# Altium PCB Tassel43_Without_RGB_Mid.pcbdoc
Units mil, origin at the board's own origin, x right, y up, seen from the top; angles counter-clockwise.
Board outline 4120 x 3600 mil, 2 copper layers (Top Layer, Bottom Layer); 26 components, 35 nets, 97 pads, 53 vias.
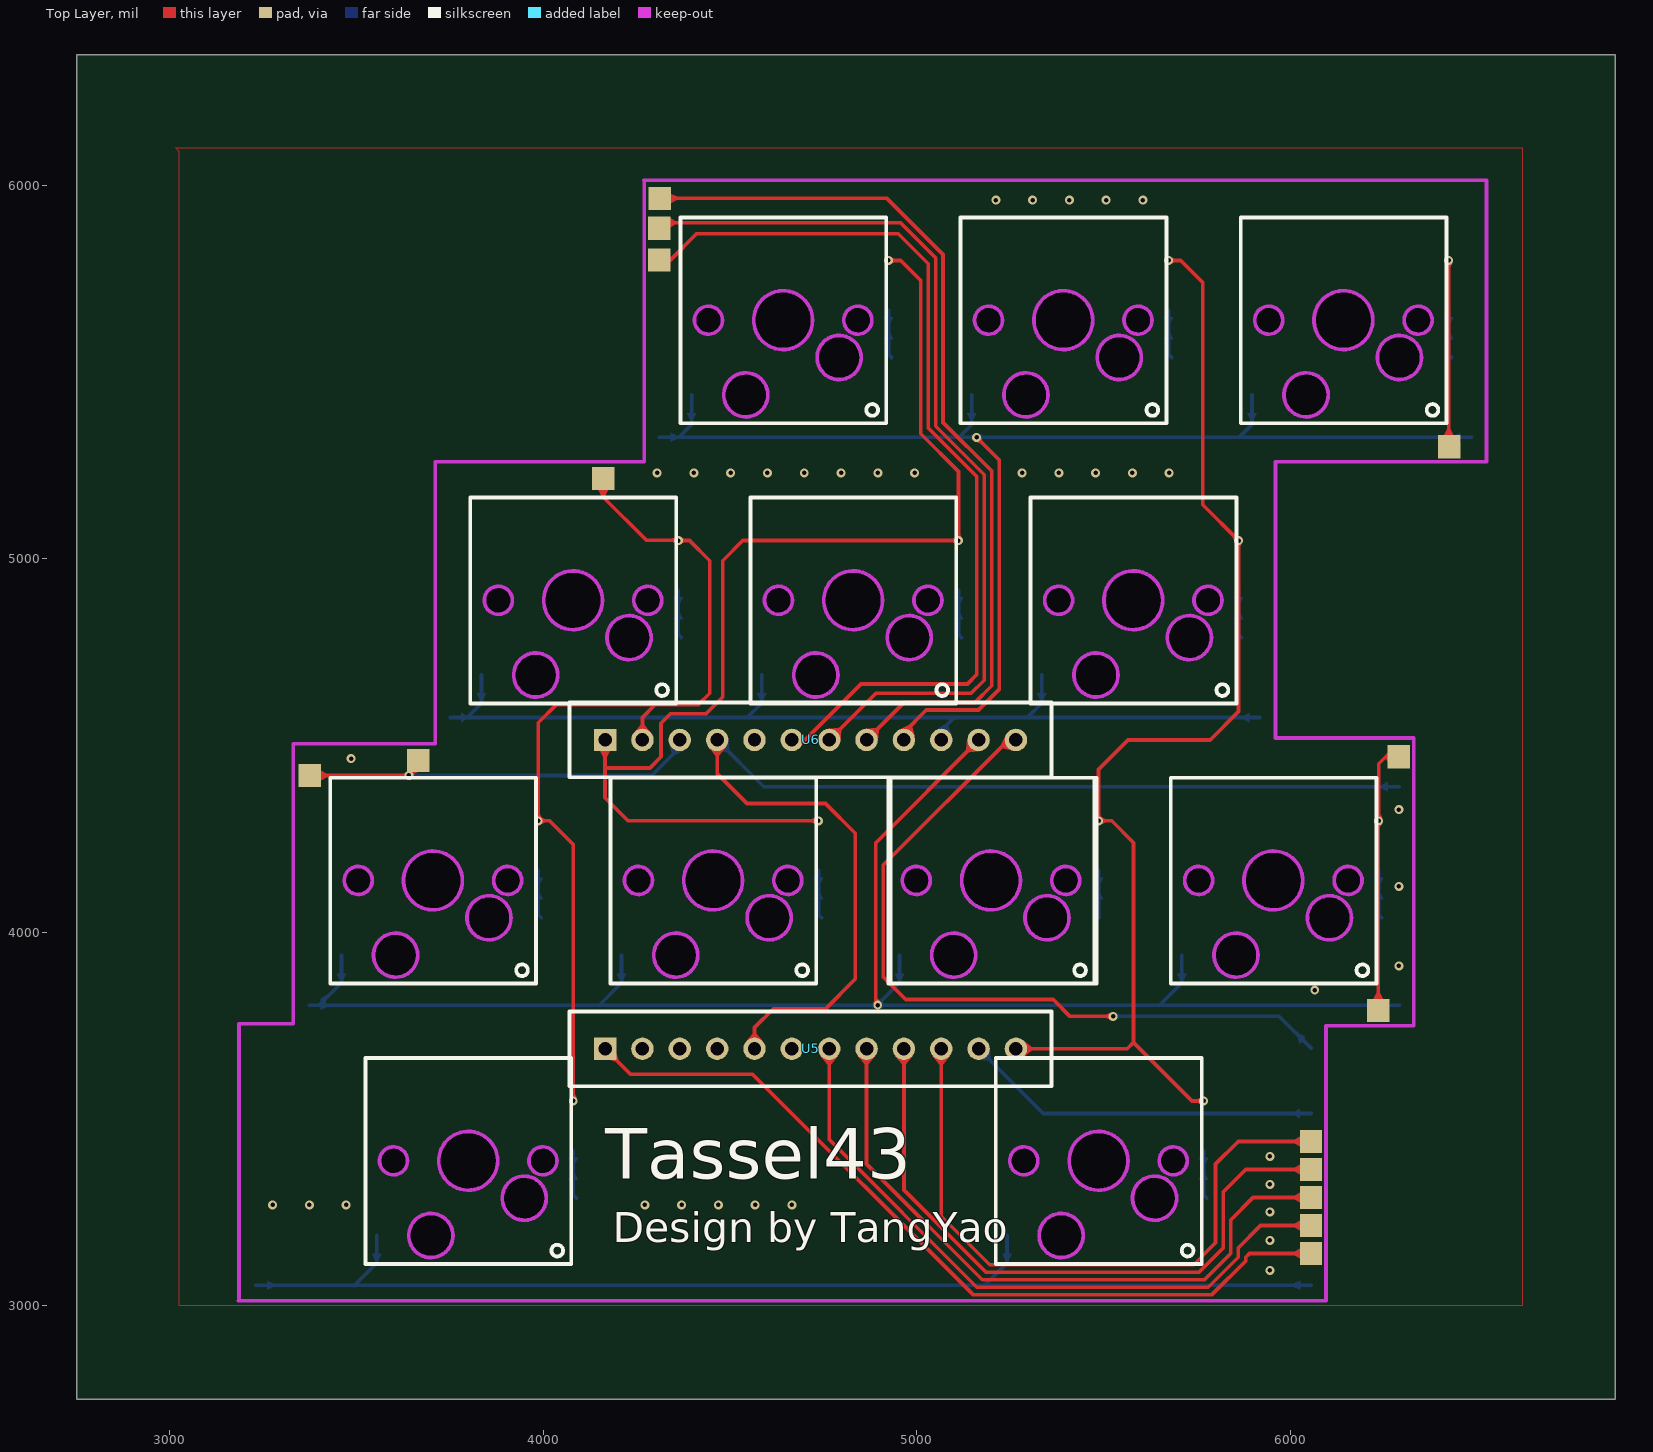
[diagram p0: Top Layer view]
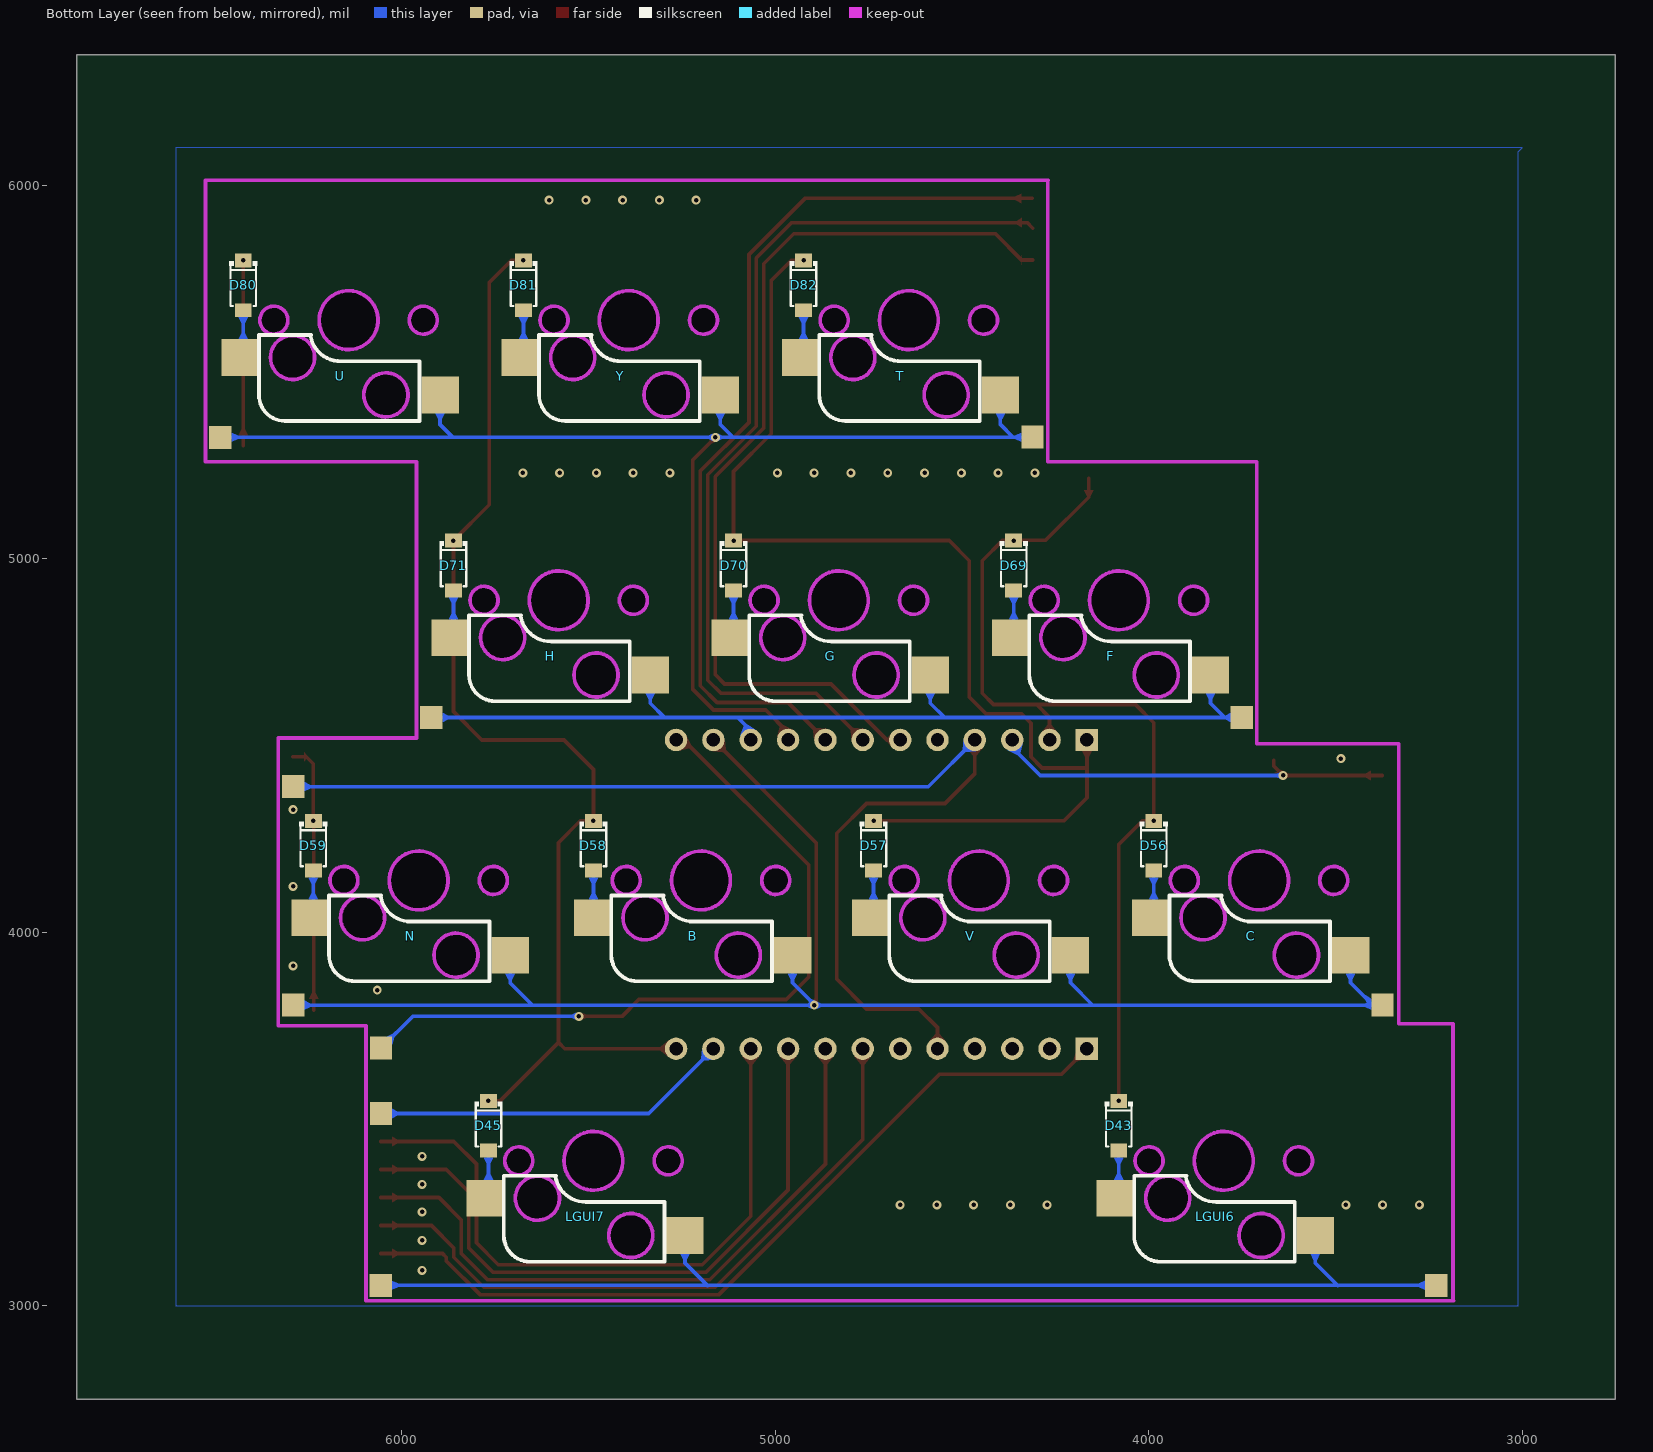
[diagram p1: Bottom Layer view, seen from below]

## Layer stack, top to bottom
Top Layer: signal copper (thickness not stored)
Dielectric: dielectric 12.6, FR-4, Dk 4.8
Bottom Layer: signal copper (thickness not stored)

## Board outline
6870,2750 2750,2750 2750,6350 6870,6350

## Components (designator, comment, footprint, x,y, rotation, side; value= is the part's Value field where it differs from the comment)
B "凯华热插拨" 凯华热插拨 5198.21,4138.89 r0 top
C "凯华热插拨" 凯华热插拨 3704.17,4138.89 r0 top
D43 "1N4148W" SOD-123_L2.8-W1.8-LS3.7-RD 4079.82,3482 r270 bottom
D45 "1N4148W" SOD-123_L2.8-W1.8-LS3.7-RD 5767.35,3482 r270 bottom
D56 "1N4148W" SOD-123_L2.8-W1.8-LS3.7-RD 3986.07,4232.01 r270 bottom
D57 "1N4148W" SOD-123_L2.8-W1.8-LS3.7-RD 4736.08,4232.01 r270 bottom
D58 "1N4148W" SOD-123_L2.8-W1.8-LS3.7-RD 5486.1,4232.01 r270 bottom
D59 "1N4148W" SOD-123_L2.8-W1.8-LS3.7-RD 6236.11,4232.01 r270 bottom
D69 "1N4148W" SOD-123_L2.8-W1.8-LS3.7-RD 4361.07,4982.03 r270 bottom
D70 "1N4148W" SOD-123_L2.8-W1.8-LS3.7-RD 5111.09,4982.03 r270 bottom
D71 "1N4148W" SOD-123_L2.8-W1.8-LS3.7-RD 5861.1,4982.03 r270 bottom
D80 "1N4148W" SOD-123_L2.8-W1.8-LS3.7-RD 6423.62,5732.05 r270 bottom
D81 "1N4148W" SOD-123_L2.8-W1.8-LS3.7-RD 5673.6,5732.05 r270 bottom
D82 "1N4148W" SOD-123_L2.8-W1.8-LS3.7-RD 4923.59,5732.05 r270 bottom
F "凯华热插拨" 凯华热插拨 4079.23,4888.9 r0 top
G "凯华热插拨" 凯华热插拨 4829.23,4888.9 r0 top
H "凯华热插拨" 凯华热插拨 5579.24,4888.9 r0 top
LGUI6 "凯华热插拨" 凯华热插拨 3798.56,3388.25 r0 top
LGUI7 "凯华热插拨" 凯华热插拨 5486.1,3388.25 r0 top
N "凯华热插拨" 凯华热插拨 5954.19,4138.89 r0 top
T "凯华热插拨" 凯华热插拨 4641.68,5638.89 r0 top
U "凯华热插拨" 凯华热插拨 6141.74,5638.89 r0 top
U5 "1X12排针" 1X12排针 4265,3588.23 r90 top
U6 "1X12排针" 1X12排针 4265,4415 r90 top
V "凯华热插拨" 凯华热插拨 4454.19,4138.89 r0 top
Y "凯华热插拨" 凯华热插拨 5391.66,5638.89 r0 top

## Footprints (in the part's own frame and the unit in brackets; to place one, negate y for a bottom-side part, rotate by r counter-clockwise, add the part's x,y. Pads: shape width x height; smd on the part's side, far side on the other; paste and mask are expansions set on the pad)
1X12排针 [mil]
  rect 60x60 hole 36: 1(100,100.01)
  round 60 hole 36 copper offset -0.01,0.01: 2(100.02,-0.01) 3(100.02,-100.01) 4(100.02,-200.01) 5(100.02,-300.01) 6(100.02,-400.01) 7(100.02,-500.01) 8(100.02,-600.01) 9(100.02,-700.01) 10(100.02,-800.01) 11(100.02,-900.01) 12(100.02,-1000.01)
  silkscreen extent 0,-1095 200,195
SOD-123_L2.8-W1.8-LS3.7-RD [mm]
  rect 0.95x1.15 smd: 1(-1.692,0) 2(1.692,0)
  silkscreen extent -1.63,-0.94 1.41,0.94
凯华热插拨 [mm]
  rect 2.55x2.5 smd far side: K1(-6.223,-5.08) K2(7.366,-2.54)
  Multi-Layer board cut-out: 2,0 1.802,0.868 1.247,1.564 0.445,1.95 -0.445,1.95 -1.247,1.564 -1.802,0.868 -2,0 -2,0 -1.802,-0.868 -1.247,-1.564 -0.445,-1.95 0.445,-1.95 1.247,-1.564 1.802,-0.868 2,0
  Multi-Layer board cut-out: -1.04,-5.08 -1.244,-4.334 -1.792,-3.788 -2.54,-3.589 -3.287,-3.788 -3.836,-4.334 -4.04,-5.08 -4.04,-5.08 -3.836,-5.826 -3.287,-6.372 -2.54,-6.571 -1.793,-6.372 -1.244,-5.826 -1.04,-5.08
  Multi-Layer board cut-out: 5.31,-2.54 5.106,-1.794 4.558,-1.248 3.81,-1.049 3.063,-1.248 2.514,-1.794 2.31,-2.54 2.31,-2.54 2.514,-3.286 3.063,-3.832 3.81,-4.031 4.557,-3.832 5.106,-3.286 5.31,-2.54
  Multi-Layer board cut-out: -4.127,0 -4.222,0.413 -4.486,0.745 -4.868,0.929 -5.292,0.929 -5.674,0.745 -5.938,0.413 -6.033,0 -6.033,0 -5.938,-0.413 -5.674,-0.745 -5.292,-0.929 -4.868,-0.929 -4.486,-0.745 -4.222,-0.413 -4.128,0
  Multi-Layer board cut-out: 6.032,0 5.938,0.413 5.674,0.745 5.292,0.929 4.868,0.929 4.486,0.745 4.222,0.413 4.127,0 4.127,0 4.222,-0.413 4.486,-0.745 4.868,-0.929 5.292,-0.929 5.674,-0.745 5.938,-0.413 6.032,0
  silkscreen extent -6.98,-7.01 7.01,6.98

## Free pads (board coordinates)
  rect 59.84x61.81 smd: 9(4310,5800) 28(4311.26,5965) 29(4310,5885) 31(3665,4460) 32(3374.68,4420) 33(6055,3440) 36(4160,5215) 42(6055,3365) 44(6055,3290) 46(6055,3215) 48(6055,3140) 55(6235,3791.09) 60(6290,4470) 64(6425,5300)
  rect 59.84x61.81 smd far side: 30(4310.67,5325.61) 33(3373.53,3805) 34(3230.2,3055) 35(3750.17,4575) 38(6055,3515) 50(6055.44,3055) 52(6055,3690) 56(6290,3805) 58(6290,4390) 62(5920,4575) 66(6485,5325)

## Via types
v1: diameter 24, hole 12, Top Layer to Bottom Layer, 53 vias

## Nets (pads, with @x,y where several pads share a name; then routed paths per layer and width w, separated by ;. In a path a pad name is that pad's centre, name@x,y a point inside that pad or via, vN(x,y) a via of type N, cw(c..) or ccw(c..) an arc to the next point about the centre after c; other vN are vias at no path point)
B1_4: B.K2 D58.2 | length 127.4
  Bottom Layer w10: D58.2 5486.1,4041 B.K2
C9_4: C.K2 D56.2 | length 129.9
  Bottom Layer w10: D56.2 3986.1,4047 C.K2
CAPLED: pad.48 U5.1 | length 2214.1
  Top Layer w10: U5.1 4233.2,3620 4560,3620 5150,3030 5775,3030 5790,3030 5880,3120 5880,3130 5890,3140 pad.48
COL0: pad.28 U6.8 | length 2424.7
  Top Layer w10: pad.28 4920,5965 5070,5815 5070,5365 5200,5235 5200,4660 5155,4615 4965,4615 U6.8
COL1: pad.29 U6.7 | length 2451.6
  Top Layer w10: pad.29 4325,5900 4350.9,5900 ; 4350,5900 4955,5900 5050,5805 5050,5355 5180,5225 5180,4675 5145,4640 4890,4640 U6.7
COL2: pad.9 U6.6 | length 2503.5
  Top Layer w10: pad.9 4340,5800 4410,5870 4950,5870 5030,5790 5030,5350 5160,5220 5160,4690 5135,4665 4850,4665 4700,4515 U6.6
COL3: pad.31 pad.32 U6.3 | length 1091.7
  Top Layer w10: pad.32 v1(3640,4420) 3665,4445 pad.31
  Bottom Layer w10: v1(3640,4420) 3880,4420 4290,4420 4365,4495 U6.3
COL4: D43.1 D56.1 D69.1 pad.36 U6.2 | length 2429.8
  Top Layer w10: v1(4079.82,3548.63) 4079.8,4235.2 4016.4,4298.6 v1(3986.07,4298.64) 3986.1,4561.1 4035,4610 4415,4610 4445,4640 4445,4995 4391.3,5048.7 v1(4361.07,5048.66) ; pad.36 4160,5165 4275,5050 v1@4361.1,5050 ; U6.2 4265.01,4575.45 4299.56,4610
COL5: D57.1 D70.1 D82.1 U6.1 | length 3063.1
  Top Layer w10: 4165,4440 4285,4440 4315,4470 4315,4560 4340,4585 4435,4585 4480,4630 4480,4995 4533.7,5048.7 v1(5111.09,5048.66) 5111.1,5233.9 5010,5335 5010,5745 4956.3,5798.7 v1(4923.59,5798.68) ; U6.1 4165,4360 4226.4,4298.6 v1(4736.08,4298.64)
COL6: D45.1 D58.1 D71.1 D81.1 U5.12 | length 3108.3
  Top Layer w10: U5.12@5265.01,3688.24 5563.24,3688.24 5580,3705 ; v1(5673.6,5798.68) 5706.32,5798.68 5765,5740 5765,5144.77 v1(5861.11,5048.66) ; v1@5767.3,3548.6 5736.4,3548.6 5580,3705 ; v1(5861.11,5048.66) 5861.1,4591.1 5785,4515 5565,4515 5486.1,4436.1 v1(5486.1,4298.64) 5521.4,4298.6 5580,4240 5580,3705
  other v1: 5767.35,3548.63
COL7: D59.1 D80.1 pad.38 pad.55 pad.60 pad.64 U5.11 | length 2181
  Top Layer w10: pad.55 v1@6235,4300 ; v1(6236.11,4298.64) 6236.1,4451.1 6255,4470 pad.60@6290.9,4470 ; pad.64@6423.6,5303.4 v1(6423.62,5798.68)
  Bottom Layer w10: U5.11@5165,3688.2 5338.3,3515 pad.38
COL8: pad.33@6055,3440 U5.10 | length 1759.9
  Top Layer w10: U5.10@5065,3688.2 5065,3240 5195,3110 5740,3110 ; 5740.8,3110 5799.5,3168.7 5799.5,3177.4 ; 5799.5,3168.9 5799.5,3379.5 5860,3440 pad.33@6055,3440
COL9: pad.42 U5.9 | length 1761.1
  Top Layer w10: U5.9@4965,3688.2 4965,3310 5185,3090 5730,3090 5755,3090 5820,3155 5820,3305 5880,3365 pad.42
COL10: pad.44 U5.8 | length 1770.5
  Top Layer w10: U5.8@4865,3688.2 4865,3380 5175,3070 5755,3070 5770,3070 5840,3140 5840,3230 5900,3290 pad.44
COL11: pad.46 U5.7 | length 1779.8
  Top Layer w10: U5.7@4765,3688.2 4765,3445 5160,3050 5765,3050 5780,3050 5860,3130 5860,3155 5920,3215 pad.46
D80_2: D80.2 U.K2 | length 129.9
  Bottom Layer w10: D80.2 6423.6,5547 U.K2
D81_2: D81.2 Y.K2 | length 129.9
  Bottom Layer w10: D81.2 5673.6,5547 Y.K2
D82_2: D82.2 T.K2 | length 129.9
  Bottom Layer w10: D82.2 4923.6,5547 T.K2
D+: U5.3
D-: U5.2
F1_4: D69.2 F.K2 | length 129.8
  Bottom Layer w10: D69.2 4361.1,4797.1 F.K2
G1_4: D70.2 G.K2 | length 129.9
  Bottom Layer w10: D70.2 5111.1,4797 G.K2
GND: U5.6 U6.5
  other v1: 5945,3095 5945,3175 5945,3251.69 3274.84,3270 3373.27,3270 3471.69,3270 4271.3,3270 4369.72,3270 4468.15,3270 4566.57,3270 4665,3270 5945,3325 5945,3400 6065,3845 6290,3910 6290,4122.78 6290,4328.55 3485,4465 4304.52,5230 4402.94,5230 4501.37,5230 4599.79,5230 4698.22,5230 4698.22,5230 4796.64,5230 4895.07,5230 4993.49,5230 5281.3,5230 5379.72,5230 5478.15,5230 5576.57,5230 5675,5230 5211.3,5960 5309.72,5960 5408.15,5960 5506.57,5960 5605,5960
H1_4: D71.2 H.K2 | length 129.9
  Bottom Layer w10: D71.2 5861.1,4797 H.K2
N1_4: D59.2 N.K2 | length 129.9
  Bottom Layer w10: D59.2 6236.1,4047 N.K2
RGB: U5.4
ROW0: pad.30 pad.66 T.K1 U6.9 U.K1 Y.K1 | length 3581.1
  Top Layer w10: U6.9 4965,4535 5025,4595 5165,4595 5220,4650 5220,5265 v1(5160,5325)
  Bottom Layer w10: pad.30 pad.66@6484.8,5325.3 ; 4362.1,5325.1 4396.7,5359.7 T.K1 ; 5112,5325.1 5146.7,5359.7 Y.K1 ; 5862.1,5325.1 5896.7,5359.7 U.K1
ROW1: F.K1 G.K1 H.K1 pad.35 pad.62 U6.10 | length 2630.9
  Bottom Layer w10: pad.35 pad.62@5917.3,4575 ; 3795.9,4575 3834.2,4613.3 F.K1 ; 4545.9,4575 4584.2,4613.3 G.K1 ; U6.10 5065.01,4540.01 5100,4575 ; 5295.9,4575 5334.2,4613.3 H.K1
ROW2: B.K1 C.K1 N.K1 pad.33@3373.53,3805 pad.56 U6.11 V.K1 | length 4379.3
  Top Layer w10: v1(4895,3805) 4890,3810 4890,4240 U6.11
  Bottom Layer w10: pad.33@3373.5,3805 pad.56@6291.8,3805 ; pad.33@3399.1,3805 3459.1,3865 C.K1@3459.1,3938.9 ; 4149.2,3805 4209.2,3865 V.K1 ; v1@4893.2,3805 4953.2,3865 B.K1 ; 5649.2,3805 5709.2,3865 N.K1
ROW3: LGUI6.K1 LGUI7.K1 pad.34 pad.50 pad.52 U6.12 | length 5160
  Top Layer w10: U6.12 5245,4515 4910,4180 4910,3880 4970,3820 5365,3820 5410,3775 v1(5525,3775)
  Bottom Layer w10: pad.34 pad.50 ; 3493.5,3054.4 3553.5,3114.4 LGUI6.K1@3553.5,3188.3 ; 5181.1,3054.4 5241.1,3114.4 LGUI7.K1@5241.1,3188.3 ; v1(5525,3775) 5970,3775 pad.52@6054.9,3690.1
RSHIFT1_4: D45.2 LGUI7.K2 | length 130.8
  Bottom Layer w10: D45.2@5767.3,3415.4 5767.3,3297 LGUI7.K2
SPACE1_4: D43.2 LGUI6.K2 | length 130.8
  Bottom Layer w10: D43.2 4079.8,3297 LGUI6.K2
V1_4: D57.2 V.K2 | length 129.9
  Bottom Layer w10: D57.2 4736.1,4047 V.K2
VCC: pad.58 U5.5 U6.4 | length 3174.6
  Top Layer w10: U6.4 4465,4425 4545,4345 4755,4345 4835,4265 4835,3875 4755,3795 4615,3795 4565,3745 U5.5@4565,3688.2
  Bottom Layer w10: U6.4 4590,4390 pad.58@6290.9,4390
"": 

## Polygon pours and split planes (outlines as drawn)
GND on Top Layer (hatched 45Degree grid 30 track 10, remove dead copper, pour order 0): 3025,3000 3025,6090 3015,6100 6620,6100 6620,3000
GND on Bottom Layer (hatched 45Degree grid 30 track 10, remove dead copper, pour order 4): 3010,3000 3010,6090 3000,6100 6605,6100 6605,3000

## Keep-outs
Board Outline Layer:
  lines w10 net "": 3183.3,3013.3 3190.8,3013.3 6093.1,3013.3 6095.7,3013.3 ; 4269.5,6013.3 6525.2,6013.3 ; 4270.05,6009.98 4270.05,5259.98 3710.05,5259.98 3710.05,4504.98 3330.05,4504.98 3330.05,3754.98 ; 6095,3015 6095,3750 6330,3750 6330,4520 5960,4520 5960,5260 6525,5260 6525,6010 ; 3330.05,3754.98 3330,3755 3185,3755 3185,3015 3185.05,3014.98 3185.05,3754.98 3330.05,3754.98
Multi-Layer:
  circle w10: c4641.68,5638.89 r78.74
  circle w10: c4541.68,5438.89 r59.05
  circle w10: c4791.68,5538.89 r59.05
  circle w10: c4441.68,5638.89 r37.5
  circle w10: c4841.68,5638.89 r37.5
  circle w10: c5391.66,5638.89 r78.74
  circle w10: c5291.66,5438.89 r59.05
  circle w10: c5541.66,5538.89 r59.05
  circle w10: c5191.66,5638.89 r37.5
  circle w10: c5591.66,5638.89 r37.5
  circle w10: c6141.74,5638.89 r78.74
  circle w10: c6041.74,5438.89 r59.05
  circle w10: c6291.74,5538.89 r59.05
  circle w10: c5941.74,5638.89 r37.5
  circle w10: c6341.74,5638.89 r37.5
  circle w10: c4079.23,4888.9 r78.74
  circle w10: c3979.23,4688.9 r59.05
  circle w10: c4229.23,4788.9 r59.05
  circle w10: c3879.23,4888.9 r37.5
  circle w10: c4279.23,4888.9 r37.5
  circle w10: c4829.23,4888.9 r78.74
  circle w10: c4729.23,4688.9 r59.05
  circle w10: c4979.23,4788.9 r59.05
  circle w10: c4629.23,4888.9 r37.5
  circle w10: c5029.23,4888.9 r37.5
  circle w10: c5579.24,4888.9 r78.74
  circle w10: c5479.24,4688.9 r59.05
  circle w10: c5729.24,4788.9 r59.05
  circle w10: c5379.24,4888.9 r37.5
  circle w10: c5779.24,4888.9 r37.5
  circle w10: c3704.17,4138.89 r78.74
  circle w10: c3604.17,3938.89 r59.05
  circle w10: c3854.17,4038.89 r59.05
  circle w10: c3504.17,4138.89 r37.5
  circle w10: c3904.17,4138.89 r37.5
  circle w10: c4454.19,4138.89 r78.74
  circle w10: c4354.19,3938.89 r59.05
  circle w10: c4604.19,4038.89 r59.05
  circle w10: c4254.19,4138.89 r37.5
  circle w10: c4654.19,4138.89 r37.5
  circle w10: c5198.21,4138.89 r78.74
  circle w10: c5098.21,3938.89 r59.05
  circle w10: c5348.21,4038.89 r59.05
  circle w10: c4998.21,4138.89 r37.5
  circle w10: c5398.21,4138.89 r37.5
  circle w10: c5954.19,4138.89 r78.74
  circle w10: c5854.19,3938.89 r59.05
  circle w10: c6104.19,4038.89 r59.05
  circle w10: c5754.19,4138.89 r37.5
  circle w10: c6154.19,4138.89 r37.5
  circle w10: c3798.56,3388.25 r78.74
  circle w10: c3698.56,3188.25 r59.05
  circle w10: c3948.56,3288.25 r59.05
  circle w10: c3598.56,3388.25 r37.5
  circle w10: c3998.56,3388.25 r37.5
  circle w10: c5486.1,3388.25 r78.74
  circle w10: c5386.1,3188.25 r59.05
  circle w10: c5636.1,3288.25 r59.05
  circle w10: c5286.1,3388.25 r37.5
  circle w10: c5686.1,3388.25 r37.5

## Other copper
Top Layer:
  region net COL7: 6411.1,5330.91 6436.1,5330.91 6428.6,5345.91 6418.6,5345.91
  region net COL7: 6260.08,4457.5 6260.08,4482.5 6255,4475 6255,4465
  region net COL7: 6222.5,3821.99 6247.5,3821.99 6240,3836.99 6230,3836.99
  region net CAPLED: 6025.08,3127.5 6025.08,3152.5 6010.08,3145 6010.08,3135
  region net COL11: 6025.08,3202.5 6025.08,3227.5 6010.08,3220 6010.08,3210
  region net COL10: 6025.08,3277.5 6025.08,3302.5 6010.08,3295 6010.08,3285
  region net COL9: 6025.08,3352.5 6025.08,3377.5 6010.08,3370 6010.08,3360
  region net CAPLED: 4195,3675.83 4177.25,3658.23 4193.2,3652.93 4200.3,3659.97
  region net COL5: 4177.5,4485 4152.5,4485 4160,4470 4170,4470
  region net COL8: 6025.08,3427.5 6025.08,3452.5 6010.08,3445 6010.08,3435
  region net COL4: 4172.5,5184.09 4147.5,5184.09 4155,5169.09 4165,5169.09
  region net COL3: 3404.59,4432.5 3404.59,4407.5 3419.59,4415 3419.59,4425
  region net COL1: 4339.92,5912.5 4339.92,5887.5 4350.9,5895 4350.9,5905
  region net COL0: 4341.18,5977.5 4341.18,5952.5 4356.18,5960 4356.18,5970
  region net COL2: 4339.92,5812.5 4339.92,5787.5 4340,5795 4340,5805
  region net COL3: 3661.59,4429.09 3636.59,4429.09 3636.46,4423.54 3647.07,4420
  region net ROW3: 5517.06,3766 5517.06,3784 5508.66,3780 5508.66,3770
  region net ROW2: 4901.14,3815.31 4884,3809.8 4885,3818.95 4895,3822.16
  region net ROW0: 5171.98,5325.75 5159.25,5313.02 5168.02,5309.91 5175.09,5316.98
  region net COL3: 3632.06,4411 3632.06,4429 3623.66,4425 3623.66,4415
  region net COL3: 3651.98,4419.25 3639.25,4431.98 3648.02,4435.09 3655.09,4428.02
  region net COL7: 6432.61,5790.73 6414.61,5790.75 6418.6,5782.35 6428.6,5782.34
  region net COL7: 6244.55,4290.11 6226.59,4291.33 6230,4282.68 6240,4282
  region net COL7: 6245.1,4306.58 6227.1,4306.57 6231.1,4314.97 6241.1,4314.98
  region net COL6: 5681.54,5789.68 5681.54,5807.68 5689.94,5803.68 5689.94,5793.68
  region net COL6: 5870.1,5040.72 5852.1,5040.73 5856.1,5032.33 5866.1,5032.32
  region net COL6: 5861.86,5060.64 5849.13,5047.91 5846.02,5056.68 5853.09,5063.75
  region net COL6: 5477.1,4306.58 5495.1,4306.58 5491.1,4314.98 5481.1,4314.98
  region net COL6: 5494.06,4307.62 5494.01,4289.62 5502.42,4293.6 5502.45,4303.6
  region net COL6: 5759.43,3539.62 5759.4,3557.62 5751,3553.6 5751.02,3543.6
  region net COL5: 4931.54,5789.69 4931.51,5807.69 4939.92,5803.7 4939.93,5793.7
  region net COL5: 5120.09,5056.59 5102.09,5056.6 5106.1,5065 5116.1,5064.99
  region net COL5: 5103.17,5057.68 5103.13,5039.68 5094.74,5043.7 5094.76,5053.7
  region net COL5: 4728.16,4289.62 4728.12,4307.62 4719.73,4303.6 4719.75,4293.6
  region net COL4: 4369.03,5039.68 4368.98,5057.68 4377.39,5053.7 4377.42,5043.7
  region net COL4: 4353.9,5058.28 4352.42,5040.34 4344.38,5045 4345.2,5055
  region net COL4: 3994.03,4307.62 3993.99,4289.62 4002.39,4293.6 4002.42,4303.6
  region net COL4: 3995.08,4306.56 3977.08,4306.59 3981.1,4314.99 3991.1,4314.97
  region net COL4: 4088.81,3556.58 4070.81,3556.56 4074.8,3564.96 4084.8,3564.97
  region net COL6: 5284.85,3665.74 5284.85,3710.74 5305.85,3693.24 5305.85,3683.24
  region net COL8: 5087.51,3668.39 5042.51,3668.4 5060,3647.4 5070,3647.4
  region net COL9: 4987.51,3668.39 4942.51,3668.4 4960,3647.4 4970,3647.4
  region net COL10: 4887.51,3668.39 4842.51,3668.4 4860,3647.4 4870,3647.4
  region net COL11: 4787.51,3668.39 4742.51,3668.4 4760,3647.4 4770,3647.4
  region net VCC: 4587.51,3708.09 4542.51,3708.08 4560,3729.08 4570,3729.08
  region net ROW3: 5256.4,4486.27 5237.57,4527.14 5225.69,4502.76 5230.15,4493.08
  region net ROW2: 5135.07,4516.89 5166.89,4485.07 5139.66,4482.59 5132.59,4489.66
  region net ROW0: 4993.75,4523.61 4952.88,4542.45 4977.26,4554.33 4986.94,4549.87
  region net COL0: 4863.13,4544.95 4894.95,4513.13 4897.43,4540.35 4890.35,4547.43
  region net COL1: 4763.13,4544.95 4794.95,4513.13 4797.43,4540.35 4790.35,4547.43
  region net COL2: 4684.86,4537.5 4684.85,4492.5 4700,4510 4700,4520
  region net VCC: 4487.51,4495.16 4442.51,4495.17 4460,4474.17 4470,4474.17
  region net COL4: 4287.51,4534.85 4242.51,4534.85 4260.01,4555.85 4270.01,4555.85
Bottom Layer:
  region net RSHIFT1_4: 5754.85,3337.45 5779.85,3337.45 5772.35,3352.45 5762.35,3352.45
  region net ROW3: 5253.56,3139.05 5228.56,3139.05 5236.06,3124.05 5246.06,3124.05
  region net SPACE1_4: 4067.32,3337.45 4092.32,3337.45 4084.82,3352.45 4074.82,3352.45
  region net ROW3: 3566.02,3139.05 3541.02,3139.05 3548.52,3124.05 3558.52,3124.05
  region net N1_4: 6223.61,4088.09 6248.61,4088.09 6241.11,4103.09 6231.11,4103.09
  region net ROW2: 5721.65,3889.69 5696.65,3889.69 5704.15,3874.69 5714.15,3874.69
  region net B1_4: 5473.6,4088.09 5498.6,4088.09 5491.1,4103.09 5481.1,4103.09
  region net ROW2: 4965.67,3889.69 4940.67,3889.69 4948.17,3874.69 4958.17,3874.69
  region net V1_4: 4723.58,4088.09 4748.58,4088.09 4741.08,4103.09 4731.08,4103.09
  region net ROW2: 4221.65,3889.69 4196.65,3889.69 4204.15,3874.69 4214.15,3874.69
  region net C9_4: 3973.57,4088.09 3998.57,4088.09 3991.07,4103.09 3981.07,4103.09
  region net ROW2: 3471.64,3889.69 3446.64,3889.69 3454.14,3874.69 3464.14,3874.69
  region net H1_4: 5848.61,4838.1 5873.61,4838.1 5866.11,4853.1 5856.11,4853.1
  region net ROW1: 5346.74,4639.69 5321.74,4639.69 5329.24,4624.69 5339.24,4624.69
  region net G1_4: 5098.59,4838.1 5123.59,4838.1 5116.09,4853.1 5106.09,4853.1
  region net ROW1: 4596.73,4639.69 4571.73,4639.69 4579.23,4624.69 4589.23,4624.69
  region net F1_4: 4348.57,4838.1 4373.57,4838.1 4366.07,4853.1 4356.07,4853.1
  region net ROW1: 3846.73,4639.69 3821.73,4639.69 3829.23,4624.69 3839.23,4624.69
  region net D80_2: 6411.12,5588.09 6436.12,5588.09 6428.62,5603.09 6418.62,5603.09
  region net ROW0: 5909.24,5389.69 5884.24,5389.69 5891.74,5374.69 5901.74,5374.69
  region net D81_2: 5661.1,5588.09 5686.1,5588.09 5678.6,5603.09 5668.6,5603.09
  region net ROW0: 5159.16,5389.69 5134.16,5389.69 5141.66,5374.69 5151.66,5374.69
  region net D82_2: 4911.09,5588.09 4936.09,5588.09 4928.59,5603.09 4918.59,5603.09
  region net ROW0: 4409.18,5389.69 4384.18,5389.69 4391.68,5374.69 4401.68,5374.69
  region net ROW0: 6455.08,5312.82 6455.08,5337.82 6440.08,5330.33 6440.08,5320.33
  region net ROW1: 5890.08,4562.5 5890.08,4587.5 5875.08,4580 5875.08,4570
  region net VCC: 6260.08,4377.5 6260.08,4402.5 6245.08,4395 6245.08,4385
  region net ROW2: 6260.08,3792.5 6260.08,3817.5 6245.08,3810 6245.08,3800
  region net ROW3: 6025.08,3700.95 6040.15,3720.91 6025.57,3726.5 6019.49,3718.44
  region net ROW3: 6025.51,3042.5 6025.51,3067.5 6010.51,3060 6010.51,3050
  region net COL7: 6025.08,3502.5 6025.08,3527.5 6010.08,3520 6010.08,3510
  region net SPACE1_4: 4067.32,3396.67 4092.32,3396.67 4084.82,3381.67 4074.82,3381.67
  region net RSHIFT1_4: 5754.85,3396.67 5779.85,3396.67 5772.35,3381.67 5762.35,3381.67
  region net C9_4: 3973.57,4146.68 3998.57,4146.68 3991.07,4131.68 3981.07,4131.68
  region net V1_4: 4723.58,4146.68 4748.58,4146.68 4741.08,4131.68 4731.08,4131.68
  region net B1_4: 5473.6,4146.68 5498.6,4146.68 5491.1,4131.68 5481.1,4131.68
  region net N1_4: 6223.61,4146.68 6248.61,4146.68 6241.11,4131.68 6231.11,4131.68
  region net F1_4: 4348.57,4896.7 4373.57,4896.7 4366.07,4881.7 4356.07,4881.7
  region net G1_4: 5098.59,4896.7 5123.59,4896.7 5116.09,4881.7 5106.09,4881.7
  region net H1_4: 5848.61,4896.7 5873.61,4896.7 5866.11,4881.7 5856.11,4881.7
  region net D80_2: 6411.12,5646.71 6436.12,5646.71 6428.62,5631.71 6418.62,5631.71
  region net D81_2: 5661.1,5646.71 5686.1,5646.71 5678.6,5631.71 5668.6,5631.71
  region net D82_2: 4911.09,5646.71 4936.09,5646.71 4928.59,5631.71 4918.59,5631.71
  region net ROW2: 3403.45,3817.5 3403.45,3792.5 3418.45,3800 3418.45,3810
  region net ROW2: 3403.45,3821.81 3403.45,3796.81 3418.45,3817.24 3418.45,3831.39
  region net ROW0: 4340.6,5338.11 4340.6,5313.11 4355.6,5320.61 4355.6,5330.61
  region net ROW1: 3780.09,4587.5 3780.09,4562.5 3795.09,4570 3795.09,4580
  region net ROW3: 3260.13,3067.5 3260.13,3042.5 3275.13,3050 3275.13,3060
  region net ROW3: 5532.94,3766 5532.94,3784 5541.34,3780 5541.34,3770
  region net ROW2: 4902.94,3796 4902.94,3814 4911.34,3810 4911.34,3800
  region net ROW2: 4887.06,3796 4887.06,3814 4878.66,3810 4878.66,3800
  region net ROW2: 4907,3805.2 4893.31,3816.88 4901.79,3820.68 4909.42,3814.17
  region net ROW0: 5168.21,5316.25 5167.66,5334.24 5176.18,5330.5 5176.48,5320.5
  region net ROW0: 5152.34,5334.24 5151.79,5316.25 5143.52,5320.5 5143.82,5330.5
  region net COL3: 3647.94,4411 3647.94,4429 3656.34,4425 3656.34,4415
  region net COL7: 5163.13,3658.3 5194.95,3690.12 5197.43,3662.9 5190.35,3655.82
  region net ROW1: 5092.81,4526.28 5050.36,4541.19 5073.31,4555.38 5083.78,4551.71
  region net VCC: 4463.12,4485.07 4494.95,4516.88 4497.42,4489.65 4490.34,4482.59
  region net COL3: 4377.14,4487.57 4336.27,4506.4 4343.08,4480.15 4352.76,4475.69

## Silkscreen, mask and mechanical layers (free items; w line width, h text height)
Top Silkscreen Layer:
  lines w10 net "": 5304.24,4612.73 5855.42,4612.73 ; 5304.24,4612.73 5304.24,5163.88 ; 5304.24,4612.73 5855.42,4612.73 ; 5304.24,4612.73 5304.24,5163.88 ; 5304.24,5163.88 5855.42,5163.88 ; 5304.24,5163.88 5855.42,5163.88 ; 5855.4,4612.73 5855.4,5163.88 ; 5855.4,4612.73 5304.22,4612.73 5304.22,5163.88 5855.4,5163.88 ; 5855.42,4612.73 5855.42,5163.88 ; 5855.42,4612.73 5855.42,5163.88 ; 3429.24,3862.72 3980.39,3862.72 3980.39,4413.88 3429.24,4413.88 3429.24,3862.72 ; 3804.23,4612.73 4355.39,4612.73 4355.39,5163.88 3804.23,5163.88 3804.23,4612.73 ; 4179.23,3862.72 4730.4,3862.72 4730.4,4413.88 4179.23,4413.88 4179.23,3862.72 ; 4366.68,5362.73 4917.89,5362.73 4917.89,5913.88 4366.68,5913.88 4366.68,5362.73 ; 4554.23,4612.73 5105.4,4612.73 5105.4,5163.88 4554.23,5163.88 4554.23,4612.73 ; 4929.22,3862.72 5480.4,3862.72 5480.4,4413.88 4929.22,4413.88 4929.22,3862.72 ; 5116.66,5362.73 5667.89,5362.73 5667.89,5913.88 5116.66,5913.88 5116.66,5362.73 ; 5679.22,3862.72 6230.4,3862.72 6230.4,4413.88 5679.22,4413.88 5679.22,3862.72 ; 5866.74,5362.73 6417.89,5362.73 6417.89,5913.88 5866.74,5913.88 5866.74,5362.73
  text "Tassel43" at 4165,3340 h135
  text "Design by TangYao" at 4185,3170 h80
Top Solder Mask Layer:
  text "Tassel43" at 4165,3340 h135
  text "Design by TangYao" at 4185,3170 h80